# Altium PCB NRF52832.PcbDoc
Units mil, origin at the board's own origin, x right, y up, seen from the top; angles counter-clockwise.
Board outline 1270 x 1473 mil, 2 copper layers (Top Layer, Bottom Layer); 27 components, 44 nets, 116 pads, 45 vias.
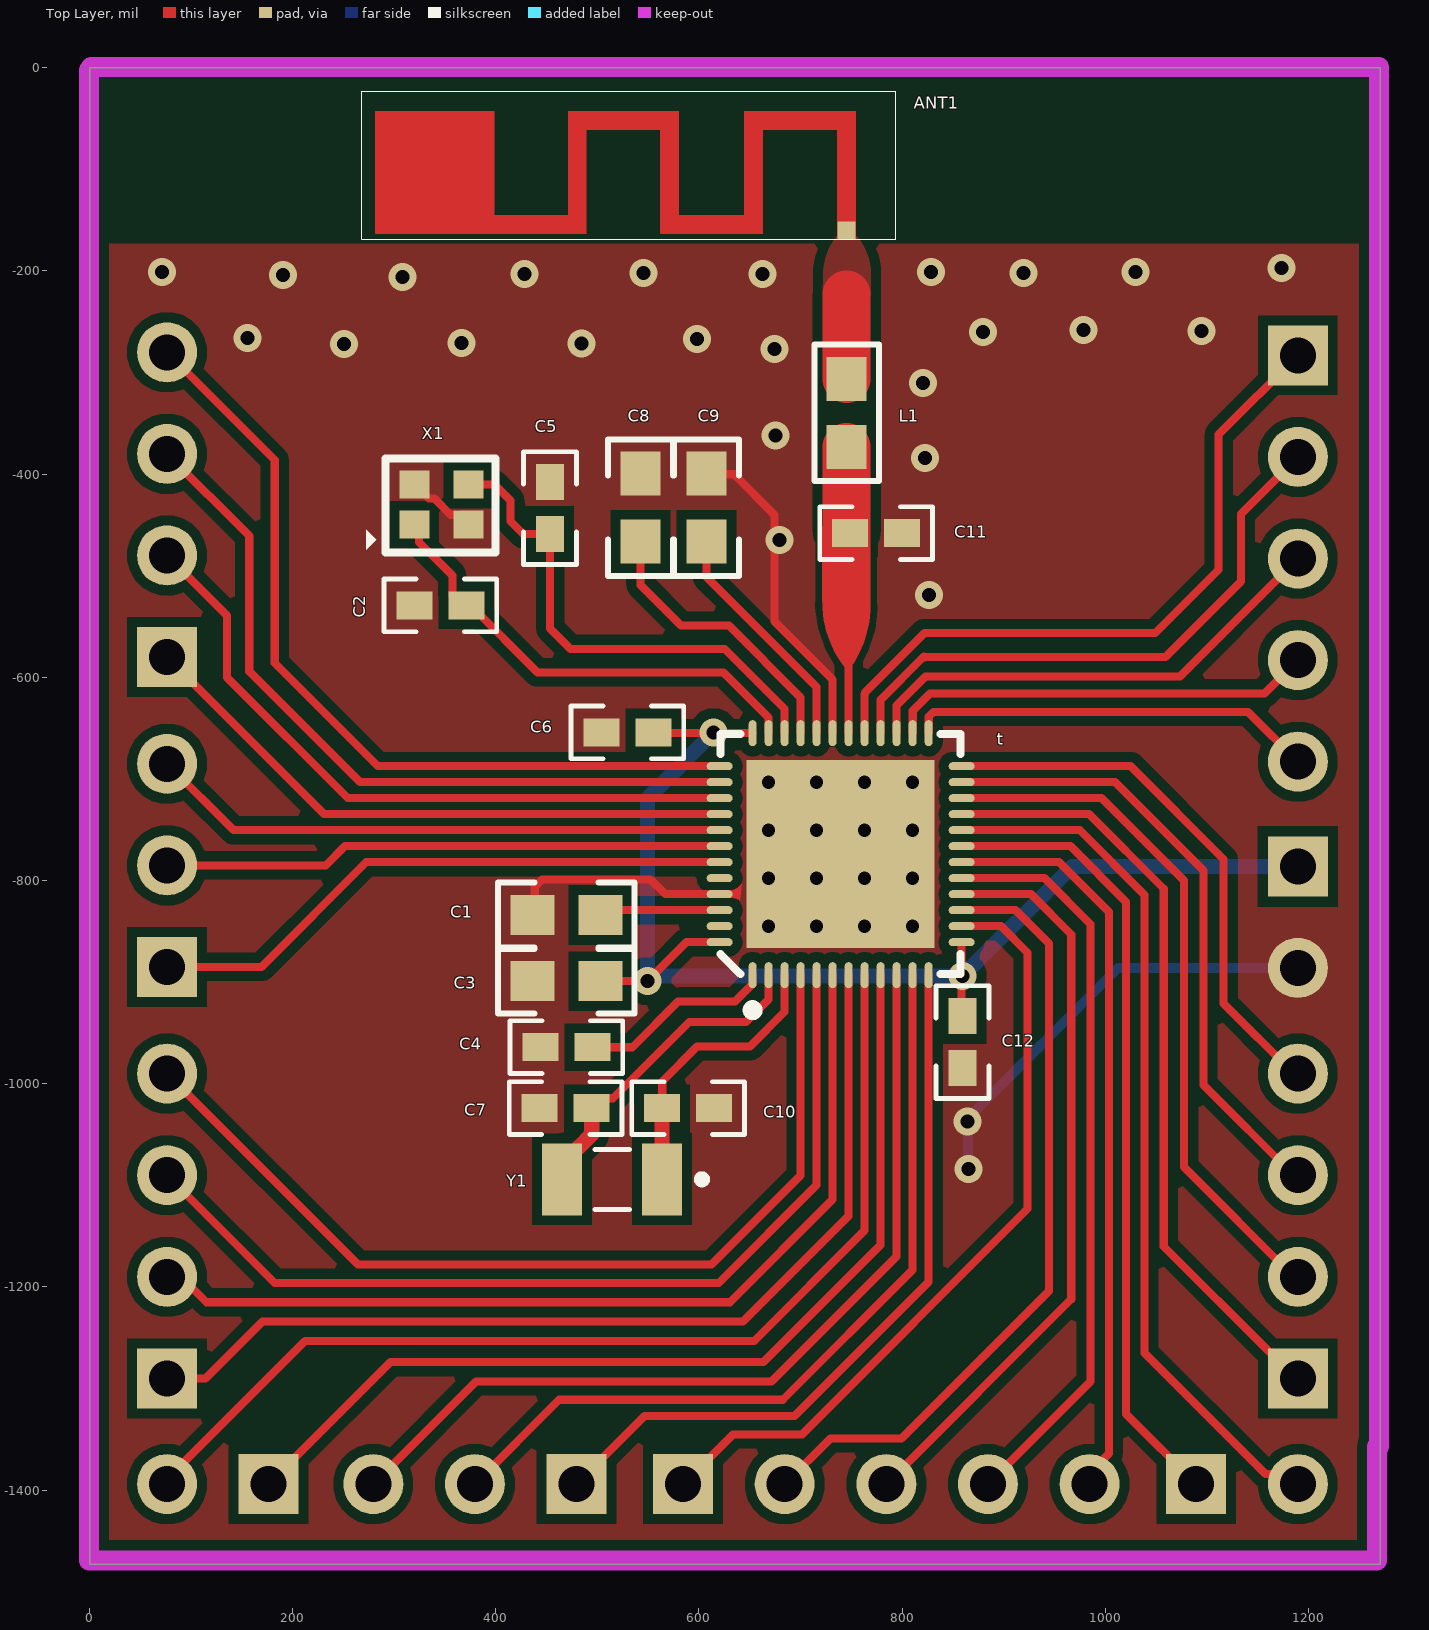
[diagram p0: Top Layer view]
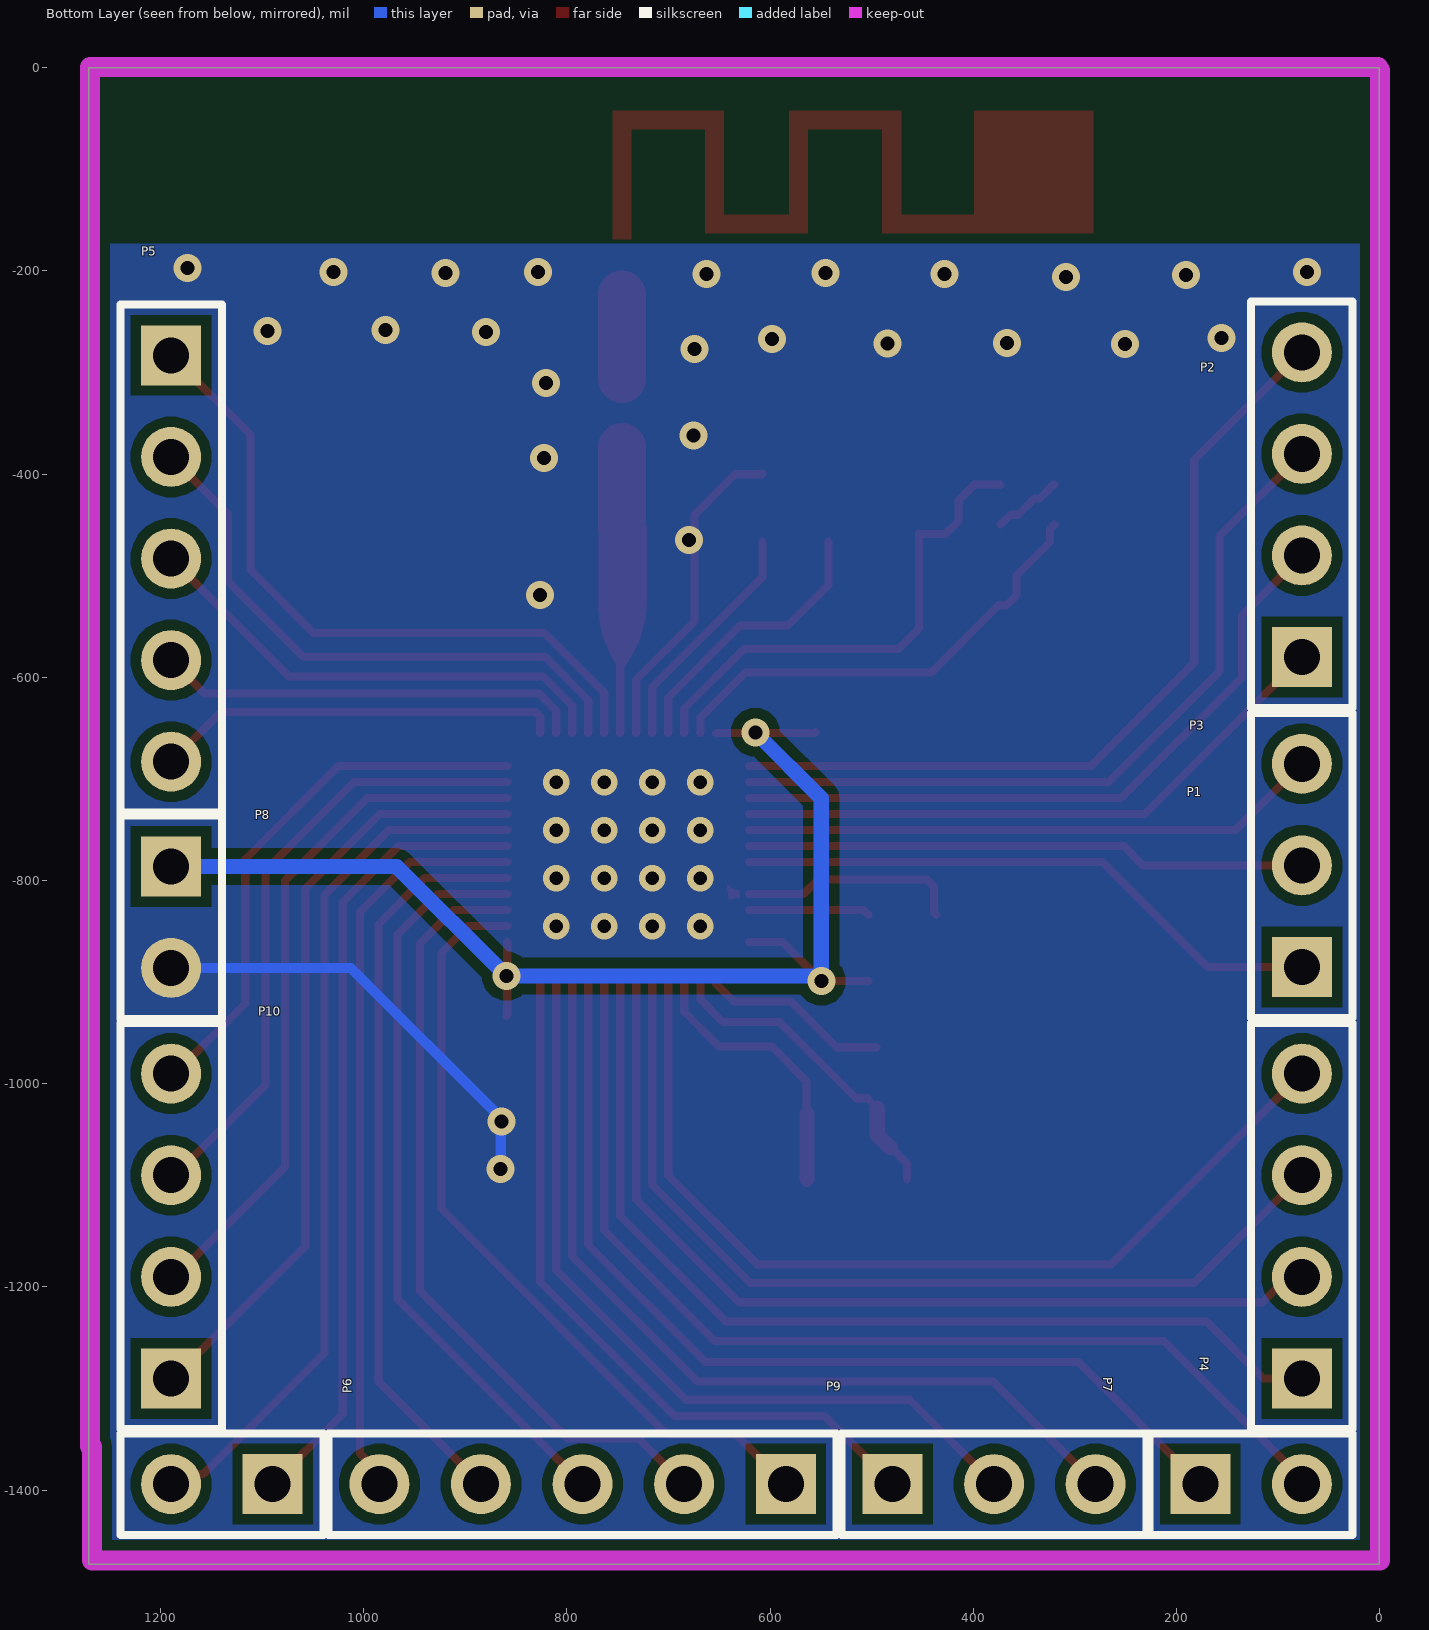
[diagram p1: Bottom Layer view, seen from below]
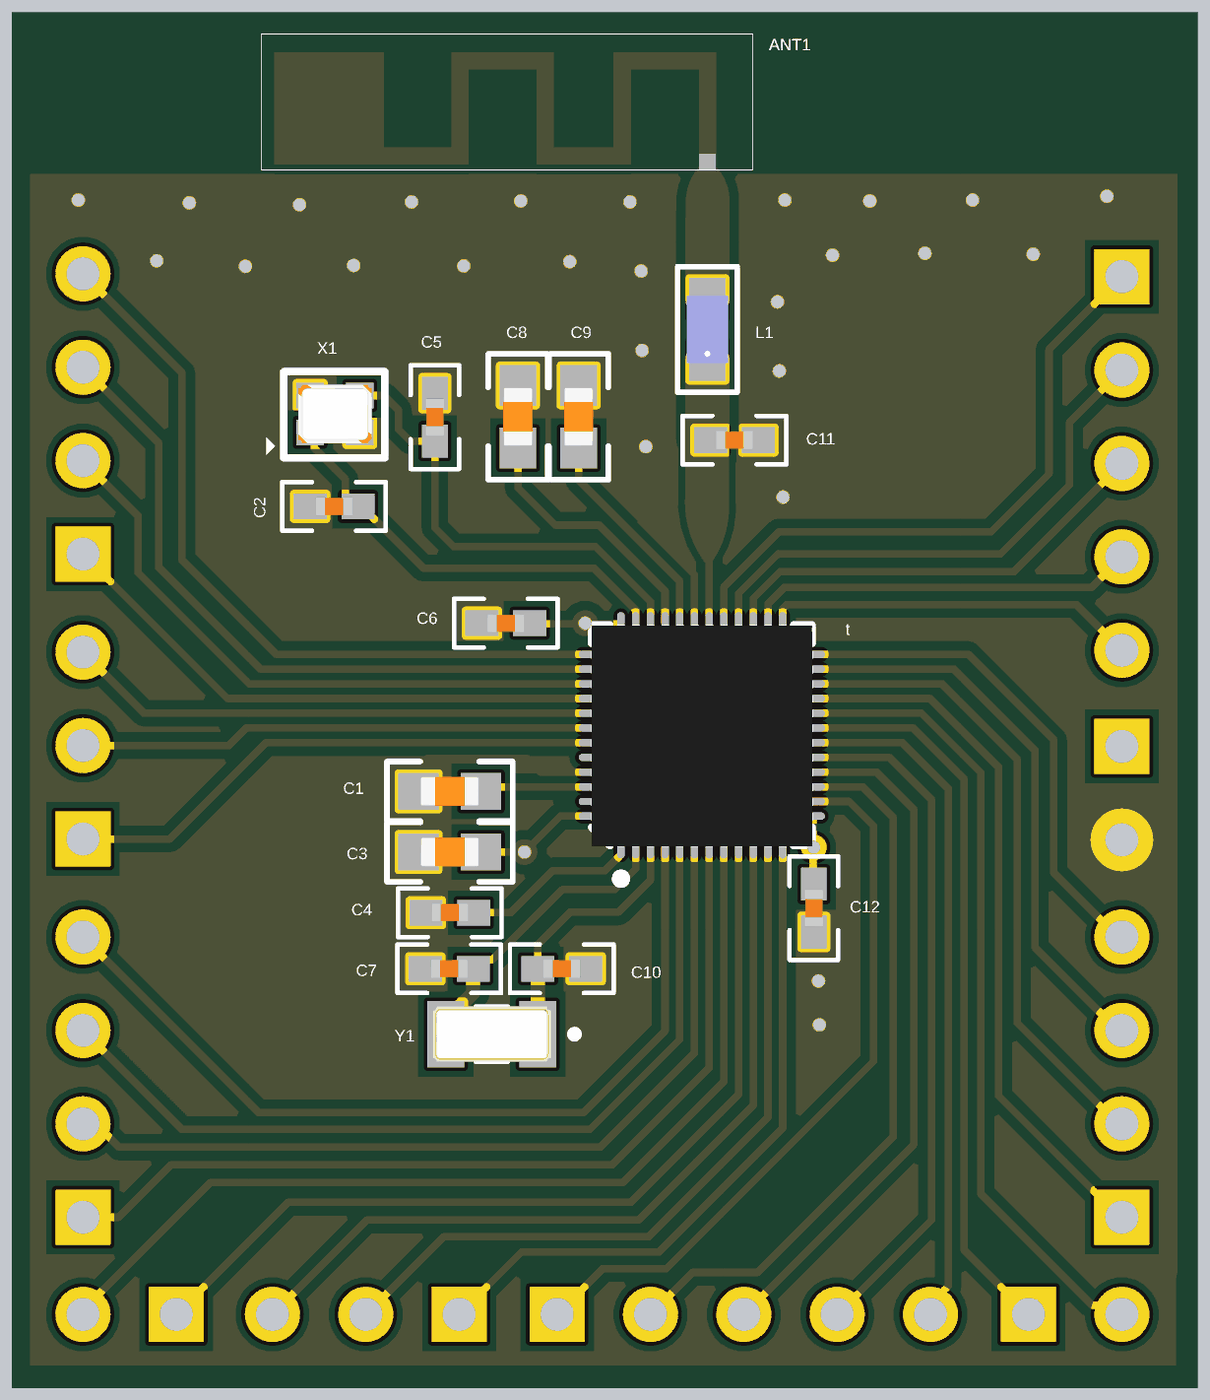
[diagram p2: 3D render of the assembled board from above, using the file's embedded part models]

## Layer stack, top to bottom
Top Solder: solder mask 0.4, Solder Resist, Dk 3.5
Top Layer: signal copper 1.4
Dielectric 1: dielectric 12.6, FR-4, Dk 4.8
Bottom Layer: signal copper 1.4
Bottom Solder: solder mask 0.4, Solder Resist, Dk 3.5

## Board outline
0.57,-0.19 1270.57,-0.19 1270.57,-1473.19 0.57,-1473.19

## Design rules (kind name [scope] priority, off if disabled: settings)
Clearance [All] p1: gap=7 ignorepadtopadclearanceinfootprint=FALSE except(10: Arc-Poly Track-Poly SMDPad-Poly THPad-Poly Via-Poly Fill-Poly Poly-Poly)
MinimumSolderMaskSliver [All] p1: minsoldermaskwidth=3
PolygonConnect [All] p1: connectstyle=Direct reliefconductorwidth=10 reliefentries=4 polygonreliefangle="90 Angle" airgapwidth=10
RoutingVias [All] p1: holewidth=11.81 width=23.62 viastyle="Through Hole" minholewidth=11.81 minwidth=23.62 maxholewidth=11.81 maxwidth=23.62
SilkToSilkClearance [All] p1: silktosilkclearance=4
SilkToSolderMaskClearance [IsPad] p1: minsilkscreentomaskgap=1 clearancetoexposedcopper=TRUE
SolderMaskExpansion [All] p1: expansion=4 istentingtop=FALSE
UnRoutedNet [All] p1: checkbadconnections=TRUE
Width [All] p1: maxlimit=55.12 minlimit=0.5 preferedwidth=10
26 further rules are at their usual default settings.

## Classes and differential pairs
component class GPIO: ANT1 C1 C2 C3 C4 C5 C6 C7 C8 C9 C10 C11 C12 L1 P1 P2 P3 P4 P5 P6 P7 P8 P9 X1 Y1

## Components (designator, comment, footprint, x,y, rotation, side; value= is the part's Value field where it differs from the comment)
ANT1 "2.45GHz" "PATCH ANTEN 2.45GHZ" 754.43,-169.04 r180 top
C1 "105/16V" "CAPC-0603 (1608)" 469.57,-834.19 r180 top
C2 "10pF" "CAPC-0402 (1005)" 345.57,-529.19 r0 top
C3 "475/10V" "CAPC-0603 (1608)" 469.57,-899.19 r0 top
C4 "104/16V" "CAPC-0402 (1005)" 469.57,-964.19 r0 top
C5 "10pF" "CAPC-0402 (1005)" 453.57,-433.59 r270 top
C6 "104/16V" "CAPC-0402 (1005)" 529.57,-654.19 r0 top
C7 "10pF" "CAPC-0402 (1005)" 468.98,-1024.19 r0 top
C8 "101/50V" "CAPC-0603 (1608)" 542.57,-433.19 r270 top
C9 "N.C" "CAPC-0603 (1608)" 607.57,-433.19 r270 top
C10 "10pF" "CAPC-0402 (1005)" 589.57,-1024.19 r180 top
C11 "0.8pF" "CAPC-0402 (1005)" 774.57,-458.19 r180 top
C12 "104/16V" "CAPC-0402 (1005)" 859.57,-959.19 r90 top
L1 "3.9nH" "IND-0603 (1608)" 745.57,-339.72 r90 top
P1 "" HDR1X3 76.57,-885.19 r90 bottom
P2 "Header 4P" HDR1X4 76.57,-580.19 r90 bottom
P3 "Header 4P" HDR1X4 76.57,-1290.19 r90 bottom
P4 "" HDR1X2 176.57,-1394.19 r180 bottom
P5 "Header 5P" HDR1X5 1189.57,-283.19 r270 bottom
P6 "" HDR1X2 1089.57,-1394.19 r0 bottom
P7 "" HDR1X3 479.57,-1394.19 r180 bottom
P8 "" HDR1X2 1189.57,-786.19 r270 bottom
P9 "Header 5P" HDR1X5 584.57,-1394.19 r0 bottom
P10 "Header 4P" HDR1X4 1189.57,-1290.19 r90 bottom
t "nRF52832_QFAA" 48-VFQFN 739.57,-774.19 r90 top (schematic designator U1)
X1 "32MHz" "CRYSTAL-XRCGB27M120F3M10R0 (2x1.6)" 346.57,-430.19 r0 top
Y1 "32.768K" XTAL_NX3215SA-32.768K-STD-MUA-14 514.57,-1094.19 r180 top

## Footprints (in the part's own frame and the unit in brackets; to place one, negate y for a bottom-side part, rotate by r counter-clockwise, add the part's x,y. Pads: shape width x height; smd on the part's side, far side on the other; paste and mask are expansions set on the pad)
48-VFQFN [mm] "VFQFN, 48-lead, Body 6x6 mm, 0.4 mm pitch,IPC High Density"
  oval 0.65x0.2 smd: 1(-3.025,2.2) 2(-3.025,1.8) 3(-3.025,1.4) 4(-3.025,1) 5(-3.025,0.6) 6(-3.025,0.2) 7(-3.025,-0.2) 8(-3.025,-0.6) 9(-3.025,-1) 10(-3.025,-1.4) 11(-3.025,-1.8) 12(-3.025,-2.2) 25(3.025,-2.2) 26(3.025,-1.8) 27(3.025,-1.4) 28(3.025,-1) 29(3.025,-0.6) 30(3.025,-0.2) 31(3.025,0.2) 32(3.025,0.6) 33(3.025,1) 34(3.025,1.4) 35(3.025,1.8) 36(3.025,2.2)
  oval 0.2x0.65 smd: 13(-2.2,-3.025) 14(-1.8,-3.025) 15(-1.4,-3.025) 16(-1,-3.025) 17(-0.6,-3.025) 18(-0.2,-3.025) 19(0.2,-3.025) 20(0.6,-3.025) 21(1,-3.025) 22(1.4,-3.025) 23(1.8,-3.025) 24(2.2,-3.025) 37(2.2,3.025) 38(1.8,3.025) 39(1.4,3.025) 40(1,3.025) 41(0.6,3.025) 42(0.2,3.025) 43(-0.2,3.025) 44(-0.6,3.025) 45(-1,3.025) 46(-1.4,3.025) 47(-1.8,3.025) 48(-2.2,3.025)
  rect 4.7x4.7 smd: 49(0,0)
  silkscreen extent -4.02,-3 3,3, body extent -3.03,-3.03 3.01,3.01, height 0.85
"CAPC-0402 (1005)" [mm] "Resistor Chip, Body 1.0x0.5mm, IPC High Density"
  rect 0.9x0.7 smd mask+0.1: 1(-0.65,0) 2(0.65,0)
  silkscreen extent -1.41,-0.66 1.41,0.66, body extent -0.5,-0.25 0.5,0.25, height 0.5
"CAPC-0603 (1608)" [mm] "Resistor, Chip; 1.60 mm L X 0.80 mm W X 0.50 mm H body"
  rect 1.1x1 smd mask+0.1: 1(-0.85,0) 2(0.85,0)
  silkscreen extent -1.71,-0.81 1.71,0.81, body extent -0.8,-0.4 0.8,0.4, height 0.6
"CRYSTAL-XRCGB27M120F3M10R0 (2x1.6)" [mm] "Crystal 2x1.6mm"
  rect 0.75x0.7 smd: 1(-0.675,-0.5) 2(0.675,-0.5) 3(0.675,0.5) 4(-0.675,0.5)
  silkscreen extent -1.87,-1.19 1.36,1.15, body extent -1,-0.8 1,0.8, height 0.65
HDR1X2 [mm] "Connector; Header; 2 Position"
  rect 1.5x1.5 hole 0.9: 1(0,0)
  round 1.5 hole 0.9: 2(2.54,0)
  silkscreen extent -1.27,-1.27 3.81,1.27, body extent -1.27,-1.27 3.81,1.27, height 7
HDR1X3 [mm] "Connector; Header; 3 Position"
  rect 1.5x1.5 hole 0.9: 1(0,0)
  round 1.5 hole 0.9: 2(2.54,0) 3(5.08,0)
  silkscreen extent -1.27,-1.27 6.35,1.27, body extent -1.27,-1.27 6.35,1.27, height 7
HDR1X4 [mm] "Connector; Header; 4 Position"
  rect 1.5x1.5 hole 0.9: 1(0,0)
  round 1.5 hole 0.9: 2(2.54,0) 3(5.08,0) 4(7.62,0)
  silkscreen extent -1.27,-1.27 8.89,1.27, body extent -1.27,-1.27 8.89,1.27, height 7
HDR1X5 [mm] "Connector; Header; 5 Position"
  rect 1.5x1.5 hole 0.9: 1(0,0)
  round 1.5 hole 0.9: 2(2.54,0) 3(5.08,0) 4(7.62,0) 5(10.16,0)
  silkscreen extent -1.27,-1.27 11.43,1.27, body extent -1.27,-1.27 11.43,1.27, height 7
"IND-0603 (1608)" [mm] "Resistor, Chip; 1.60 mm L X 0.80 mm W X 0.50 mm H body"
  rect 1.1x1 smd mask+0.1: 1(-0.85,0) 2(0.85,0)
  silkscreen extent -1.71,-0.81 1.71,0.81, body extent -0.92,-0.56 0.92,0.56, height 0.9
"PATCH ANTEN 2.45GHZ" [mm]
  rect 0.45x0.45 smd mask+0.102: 1(0.225,-0.225)
  Top Layer region: 0,0 0.45,0 0.45,-2.75 2.318,-2.75 2.318,-0.156 4.868,-0.156 4.868,-2.75 6.736,-2.75 6.736,-0.156 12.004,-0.156 12.004,-3.2 9.036,-3.2 9.036,-0.606 7.186,-0.606 7.186,-3.2 4.418,-3.2 4.418,-0.606 2.768,-0.606 2.768,-3.2 0,-3.2
  Top Layer lines w0.02: 0.225,0 0.225,0 ; 0.225,0 0,0 0,-0.225 0,-3.2 2.768,-3.2 2.768,-0.606 4.418,-0.606 4.418,-3.2 7.186,-3.2 7.186,-0.606 9.036,-0.606 9.036,-3.2 12.004,-3.2 12.004,-0.156 6.736,-0.156 6.736,-2.75 4.868,-2.75 4.868,-0.156 2.318,-0.156 2.318,-2.75 0.45,-2.75 0.45,-0.225 0.45,-0.102 0.45,0 0.225,0 ; 0.225,0 0.225,0
  silkscreen extent -1,-3.7 12.35,0
XTAL_NX3215SA-32.768K-STD-MUA-14 [mm]
  rect 1x1.8 smd: 1(-1.25,0) 2(1.25,0)
  silkscreen extent -2.35,-0.75 0.43,0.75, body extent -1.6,-0.75 1.6,0.75, height 0.9

## Part data
ANT1: library part "PCB antenna 2.45GHZ", "PCB ANTENNA 2.45GHZ"
C1: library part CC0603KRX7R7BB105, "CAP CER 1uF 10% 16V X7R 0603", Category=CAPACITOR, CMT=105/16V, MPN=CC0603KRX7R7BB105, PinCount=2, Solder=SMT
C2 C5 C7 C10 C11: library part C0402C100J3GACTU, "CAP CER 10PF 25V C0G/NP0 0402", Digikey MPN=399-7746-1-ND, MFR=KEMET, Category=CAPACITOR, CMT=10pF/25V, MPN=C0402C100J3GACTU, Solder=SMT
C3: library part CL10A475KP8NNNC, "CAP CER 4.7uF 10% 10V X5R 0603", Category=CAPACITOR, CMT=475/10V, MPN=CL10A475KP8NNNC, PinCount=2, Solder=SMT
C4 C6 C12: library part CC0402KRX7R7BB104, "CAP CER 0.1UF 16V X7R 0402", MFR=Yageo, Category=CAPACITOR, CMT=104/16V, MPN=CC0402KRX7R7BB104, Solder=SMT
C8 C9: library part GRM1885C1H101JA01D, "CAP CER 100pF 5% 50V C0G/NP0 0603", Category=CAPACITOR, CMT=101/50V, MPN=GRM1885C1H101JA01D, PinCount=2, Solder=SMT
L1: library part HK16083N9S-T, "FIXED IND 3.9NH 300MA 140 MOHM", Category="FERRITE BEAD", CMT=3.9nH, MPN=HK16083N9S-T, PinCount=2, Solder=SMT
P1 P7: library part "Header 3x1", "Header, 3-Pin, pitch 2.54mm", Solder=WAVE
P2 P3 P10: library part "Header 4x1", "Header, 4 Pin Pitch 2.54mm", MPN=S1012EC-40-ND, CMT="Header 4P", Solder=WAVE
P4 P6 P8: library part "Header 2x1", "Header, 2-Pin, pitch 2.54mm", Solder=WAVE
P5 P9: library part "Header 5x1", "Header, 5 Pin Pitch 2.54mm", MPN=S1012EC-40-ND, CMT="Header 5P", Solder=WAVE
t: "Multi-protocol Bluetooth low energy, ANT, and 2.4 GHz proprietary system on chip", MFR="Nordic Semiconductor", MPN=nRF52832_QFAA
X1: library part R2016-32.000-8-F-1010-EXT-TR, "XTAL 32MHZ 8PF SMD", MFR="Raltron Electronics", Category=CRYSTAL, CMT=32MHz, MPN=R2016-32.000-8-F-1010-EXT-TR, Solder=SMT
Y1: library part NX3215SA-32.768K-STD-MUA-14, "32.768kHz Â±20ppm Crystal 6pF 70 kOhms 2-SMD, No Lead  MANUFACTURER: NIHON DEMPA KOGYO", Package=None, Availability=Unavailable, MF="{'manufacturer': u'NDK America,'}", MP=NX3215SA-32.768K-STD-MUA-14, Price=None

## Via types
v1: diameter 27.56, hole 13.78, Top Layer to Bottom Layer, tented both sides, 28 vias
v2: diameter 25.98, hole 12.99, Top Layer to Bottom Layer, 16 vias
v3: diameter 27.56, hole 13.78, Top Layer to Bottom Layer, 1 vias

## Nets (pads, with @x,y where several pads share a name; then routed paths per layer and width w, separated by ;. In a path a pad name is that pad's centre, name@x,y a point inside that pad or via, vN(x,y) a via of type N, cw(c..) or ccw(c..) an arc to the next point about the centre after c; other vN are vias at no path point)
ANT: ANT1.1 L1.2 | length 83.1
  Top Layer w47.24: L1.2 745.57,-223.19
GND: C1.2 C2.1 C3.1 C4.1 C5.1 C6.1 C7.1 C8.1 C9.1 C10.1 C11.1 C12.1 P8.2 t.31 t.45 t.49 X1.2 X1.4 | length 1048.3
  Top Layer w8: X1.4 320.98,-410.5 334.57,-424.09 339.73,-424.09 355.73,-440.09 363.37,-440.09 X1.2 ; C1.2 438.57,-831.72 438.57,-806.19 445.57,-799.19 552.57,-799.19 566.94,-813.56 t.45 ; C9.1 608.04,-400.19 634.57,-400.19 674.57,-440.19 674.57,-545.18 731.7,-602.31 t.31
  Bottom Layer w10: v1(865.57,-1084.19) 865.07,-1083.69 865.07,-1034.69 864.57,-1034.19 1012.57,-886.19 P8.2
  other v1: 864.57,-1037.19 826.57,-519.19 679.57,-465.19 822.57,-384.19 675.57,-362.19 820.57,-310.19 674.57,-277.19 250.57,-272.19 484.57,-271.69 366.57,-271.19 598.07,-267.19 155.57,-266.19 879.57,-260.19 1094.57,-259.19 978.57,-258.19 308.57,-206.19 190.57,-204.19 428.57,-203.19 662.57,-203.19 545.57,-202.19 919.57,-202.19 71.57,-201.19 828.57,-201.19 1029.57,-201.19 1173.57,-197.19
  other v2: 668.71,-845.05 715.95,-845.05 763.2,-845.05 810.44,-845.05 668.71,-797.81 715.95,-797.81 763.2,-797.81 810.44,-797.81 668.71,-750.56 715.95,-750.56 763.2,-750.56 810.44,-750.56 668.71,-703.32 715.95,-703.32 763.2,-703.32 810.44,-703.32
NetC1_1: C1.1 t.46 | length 119.5
  Top Layer w8: C1.1 507.92,-829.3 568.66,-829.3 t.46
NetC2_2: C2.2 t.35 X1.1 | length 461.5
  Top Layer w8: X1.1 324.57,-454.44 324.57,-467.19 357.45,-500.06 357.45,-519.41 367.23,-529.19 C2.2 375.1,-529.19 441.1,-595.19 624.19,-595.19 668.65,-639.65 668.65,-655.03 t.35
NetC4_2: C4.2 t.1 | length 192.3
  Top Layer w8: C4.2 534.57,-964.19 579.57,-919.19 635.79,-919.19 652.96,-902.01 t.1
NetC5_2: C5.2 t.34 X1.3 | length 493.5
  Top Layer w8: X1.3@373.38,-410.73 X1.3 399,-410.5 414.5,-426 414.5,-446.5 427.19,-459.19 C5.2 453.57,-552.19 473.57,-572.19 625.57,-572.19 684.46,-631.07 t.34
NetC7_2: C7.2 t.2 Y1.2 | length 324.8
  Top Layer w8: Y1.2 465.36,-1078.44 481.05,-1062.75 Y1.2@481.79,-1062.75 ; C7.2 504.35,-1014.41 515.35,-1014.41 590.57,-939.19 646.57,-939.19 668.65,-917.11 668.65,-893.34 t.2
  Top Layer w15: Y1.2@481.79,-1062.75 494.57,-1049.96 C7.2
NetC8_2: C8.2 t.33 | length 281.3
  Top Layer w8: C8.2 542.57,-509.19 582.57,-549.19 629.57,-549.19 700.2,-619.82 t.33
NetC9_2: C9.2 t.32 | length 233.3
  Top Layer w8: C9.2 607.57,-501.19 715.95,-609.56 t.32
NetC10_2: C10.2 t.3 Y1.1 | length 275.9
  Top Layer w8: C10.2 563.98,-997.78 598.3,-963.46 650.3,-963.46 684.46,-929.3 t.3
  Top Layer w15: Y1.1 C10.2@563.79,-1029.58
NetC11_2: C11.2 L1.1 t.30 | length 280
  Top Layer w8: t.30 C11.2@747.45,-456.65
  Top Layer w47.24: C11.2@745.57,-454.78 L1.1
P0.02: P3.4 t.4 | length 935.1
  Top Layer w8: P3.4 264.57,-1178.19 612.57,-1178.19 700.2,-1090.56 t.4
P0.03: P3.3 t.5 | length 929.7
  Top Layer w8: P3.3 182.57,-1196.19 619.57,-1196.19 715.95,-1099.81 t.5
P0.04: P3.2 t.6 | length 928.1
  Top Layer w8: P3.2 90.39,-1190.19 115.39,-1215.19 630.57,-1215.19 731.7,-1114.06 t.6
P0.05: P3.1 t.7 | length 974.1
  Top Layer w8: P3.1 114.57,-1290.19 170.57,-1234.19 643.57,-1234.19 747.45,-1130.31 t.7
P0.06: P4.2 t.8 | length 1044.2
  Top Layer w8: P4.2 76.57,-1389.19 212.57,-1253.19 654.57,-1253.19 763.2,-1144.56 t.8
P0.07: P4.1 t.9 | length 965.4
  Top Layer w8: P4.1 296.57,-1274.19 663.57,-1274.19 778.94,-1158.82 t.9
P0.08: P7.3 t.10 | length 884.7
  Top Layer w8: P7.3 282.07,-1391.69 380.57,-1293.19 671.57,-1293.19 794.69,-1170.07 t.10
P0.09: P7.2 t.11 | length 808.2
  Top Layer w8: P7.2 462.57,-1311.19 682.57,-1311.19 810.44,-1183.32 810.44,-1070.92 t.11
P0.10: P7.1 t.12 | length 730.9
  Top Layer w8: P7.1 505.1,-1368.66 546.57,-1327.19 694.12,-1327.19 826.19,-1195.12 t.12
P0.11: P9.1 t.14 | length 779
  Top Layer w8: P9.1 633.57,-1345.19 701.57,-1345.19 923.57,-1123.19 923.57,-871.19 897.44,-845.05 t.14
P0.12: P9.2 t.15 | length 780.2
  Top Layer w8: P9.2 729.57,-1349.19 799.57,-1349.19 944.57,-1204.19 944.57,-862.19 911.69,-829.3 t.15
P0.13: P9.3 t.16 | length 740.7
  Top Layer w8: P9.3 966.57,-1212.19 966.57,-853.19 926.94,-813.56 t.16
P0.14: P9.4 t.17 | length 738.5
  Top Layer w8: t.17 940.2,-797.81 985.57,-843.19 985.57,-1293.19 P9.4
P0.15: P9.5 t.18 | length 736.1
  Top Layer w8: t.18 954.45,-782.06 1003.57,-831.19 1003.57,-1363.97 984.57,-1382.97 P9.5
P0.16: P6.1 t.19 | length 786.2
  Top Layer w8: t.19 965.7,-766.31 1020.57,-821.19 1020.57,-1325.19 P6.1
P0.17: P6.2 t.20 | length 861.7
  Top Layer w8: t.20 974.95,-750.56 1038.57,-814.19 1038.57,-1265.19 1157.81,-1384.42 1179.81,-1384.42 P6.2
P0.18: P10.1 t.21 | length 767.1
  Top Layer w8: t.21 984.2,-734.82 1057.57,-808.19 1057.57,-1160.19 1162.05,-1264.66 1164.05,-1264.66 P10.1
P0.19: P10.2 t.22 | length 691.2
  Top Layer w8: t.22 996.46,-719.07 1077.57,-800.19 1077.57,-1082.19 1185.57,-1190.19 P10.2
P0.20: P10.3 t.23 | length 614.8
  Top Layer w8: t.23 1009.71,-703.32 1096.57,-790.19 1096.57,-1001.19 1185.57,-1090.19 P10.3
P0.21: P10.4 t.24 | length 539.4
  Top Layer w8: t.24 1024.96,-687.57 1116.57,-779.19 1116.57,-921.19 1185.57,-990.19 P10.4
P0.22: P5.3 t.27 | length 482.1
  Top Layer w8: t.27 794.69,-627.71 823.21,-599.19 1073.57,-599.19 P5.3
P0.23: P5.2 t.28 | length 581.2
  Top Layer w8: t.28 778.94,-622.24 821.39,-579.79 ; 822.1,-580.5 822.42,-580.19 1059.31,-580.19 1133.57,-505.93 1133.57,-439.19 P5.2
P0.24: P5.1 t.29 | length 681.5
  Top Layer w8: t.29 763.2,-616.78 ; 763.45,-616.78 763.45,-615.11 822.06,-556.5 1049.26,-556.5 1111.57,-494.19 1111.57,-361.19 P5.1
P0.25: P2.4 t.37 | length 829.8
  Top Layer w8: P2.4 182.57,-386.18 182.57,-586.19 283.96,-687.57 t.37
P0.26: P2.3 t.38 | length 755.7
  Top Layer w8: P2.3 157.57,-461.19 157.57,-594.19 266.71,-703.32 t.38
P0.27: P2.2 t.39 | length 678.6
  Top Layer w8: P2.2 135.57,-539.19 135.57,-600.19 254.46,-719.07 t.39
P0.28: P2.1 t.40 | length 608
  Top Layer w8: P2.1 231.2,-734.82 t.40
P0.29: P1.3 t.41 | length 571
  Top Layer w8: P1.3 141.95,-750.56 t.41
P0.30: P1.2 t.42 | length 551.7
  Top Layer w8: P1.2 232.83,-785.19 251.7,-766.31 t.42
P0.31: P1.1 t.43 | length 586.6
  Top Layer w8: P1.1 169.57,-885.19 272.7,-782.06 t.43
SWDCLK: P5.5 t.25 | length 401.8
  Top Layer w8: t.25 826.25,-655.03 826.25,-638.87 830.94,-634.19 1140.57,-634.19 P5.5
SWDIO: P5.4 t.26 | length 421.8
  Top Layer w8: t.26 810.5,-655.03 810.5,-633.11 827.61,-616 1156.76,-616 P5.4
VDD: C3.2 C6.2 C12.2 P8.1 t.13 t.36 t.48 | length 1263.4
  Top Layer w8: C3.2 v1(549.57,-899.19) 587.96,-860.8 t.48 ; C6.2 556.07,-655.09 614.57,-655.09 t.36 ; t.13 858.67,-894.19 858.67,-932.69 C12.2
  Bottom Layer w15: v1(614.57,-654.19) 549.57,-719.19 v1(549.57,-899.19) 552.97,-899.19 557.97,-894.19 v3(859.57,-894.19) 967.57,-786.19 P8.1
pads on no net: t.44 t.47

## Polygon pours and split planes (outlines as drawn)
GND on Top Layer "GND_L01_P003" (solid, remove dead copper, pour order 3): 11.57,-173.19 1257.57,-173.19 1257.57,-1458.19 10.57,-1458.19 10.57,-1426.19
ANT on Top Layer "ANT_L01_P000" (solid, pour order 0): 769.33,-228.43 769.33,-203.29 ccw(c711.68,-203.29) 754.43,-164.62 cw(c753.4,-163.59) 753.4,-165.04 736.72,-165.04 ccw(c782.92,-204.18) 722.37,-204.18 722.07,-223.19
GND on Bottom Layer "GND_L02_P004" (solid, remove dead copper, pour order 4): 7.57,-173.19 1253.57,-173.19 1253.57,-1458.19 6.57,-1458.19 6.57,-1426.19

## Keep-outs
Keep-Out Layer:
  lines w19.68: -0.43,-1469.19 -0.43,-441.19 -0.43,-2.19 1.57,-2.19 1.57,0.81 1269.57,0.81 1269.57,-1357.19 1267.57,-1357.19 1267.57,-1469.19 64.57,-1469.19 -0.43,-1469.19

## Other copper
Top Layer:
  region net GND: 642.47,-803.25 639.94,-805.77 cw(c630.28,-796.12) 630.28,-809.77 630.28,-816.98 630.54,-817.23 633.38,-817.23 cw(c633.38,-827.04) 640.32,-820.11
  region net NetC11_2: 768.57,-451.19 768.57,-523.91 cw(c665.53,-530.01) 746.56,-593.96 cw(c829.83,-524.68) 721.57,-520.73 721.57,-451.19